# EAGLE board CT_schematic (EAGLE 7.6.0)

Size 100 x 80 mm. Coordinates in mm from the lower left corner, seen from the top.
Outline: 0,0 100,0 100,80 0,80 0,0
Copper layers (1*16): Top 0.035mm / dielectric 1.5mm / Bottom 0.035mm
Design rules "default": minimum track width 10mil, minimum drill 24mil, track to track 8mil, track to pad 8mil, pad to pad 8mil, via to via 8mil, smd to smd 8mil, copper to edge 40mil, drill to drill 8mil, minimum pad ring 10mil, minimum via ring 8mil, stop-mask expansion 4mil, vias tented up to drill 0mil, thermal gap 10mil

## Footprints (pad centres in the part's own frame; a part is rotated, then mirrored left to right if it is on the bottom)
C0603 = smd 0.8 x 0.8: 1 -0.762,0; 2 0.762,0
C0402 = smd 0.5 x 0.5: 1 -0.508,0; 2 0.508,0
C0805 = smd 1.2 x 1.3: 1 -1.016,0; 2 1.016,0
C1210 = smd 1.2 x 2.5: 1 -1.524,0; 2 1.524,0
C1206 = smd 1.3 x 1.6: 1 -1.524,0; 2 1.524,0
EXV-9H = smd 3.505 x 1.676: 1 -2.857,0; 2 2.857,0
L0603 = smd 0.8 x 0.8: 1 -0.762,0; 2 0.762,0
PJ-037B_PACKAGE = drill 3.7 square: 1 12,0 | drill 3.2 square: 2 6,0
R0603 = smd 0.8 x 0.8: 1 -0.762,0; 2 0.762,0
UFBGA169 = smd 0.35 x 0.35: A1 -3.9,3.9; A2 -3.25,3.9; A3 -2.6,3.9; A4 -1.95,3.9; A5 -1.3,3.9; A6 -0.65,3.9; A7 0,3.9; A8 0.65,3.9; A9 1.3,3.9; A10 1.95,3.9; A11 2.6,3.9; A12 3.25,3.9; A13 3.9,3.9; B1 -3.9,3.25; B2 -3.25,3.25; B3 -2.6,3.25; B4 -1.95,3.25; B5 -1.3,3.25; B6 -0.65,3.25; B7 0,3.25; B8 0.65,3.25; B9 1.3,3.25; B10 1.95,3.25; B11 2.6,3.25; B12 3.25,3.25; B13 3.9,3.25; C1 -3.9,2.6; C2 -3.25,2.6; C3 -2.6,2.6; C4 -1.95,2.6; C5 -1.3,2.6; C6 -0.65,2.6; C7 0,2.6; C8 0.65,2.6; C9 1.3,2.6; C10 1.95,2.6; C11 2.6,2.6; C12 3.25,2.6; C13 3.9,2.6; D1 -3.9,1.95; D2 -3.25,1.95; D3 -2.6,1.95; D4 -1.95,1.95; D5 -1.3,1.95; D6 -0.65,1.95; D7 0,1.95; D8 0.65,1.95; D9 1.3,1.95; D10 1.95,1.95; D11 2.6,1.95; D12 3.25,1.95; D13 3.9,1.95; E1 -3.9,1.3; E2 -3.25,1.3; E3 -2.6,1.3; E4 -1.95,1.3; E5 -1.3,1.3; E6 -0.65,1.3; E7 0,1.3; E8 0.65,1.3; E9 1.3,1.3; E10 1.95,1.3; E11 2.6,1.3; E12 3.25,1.3; E13 3.9,1.3; F1 -3.9,0.65; F2 -3.25,0.65; F3 -2.6,0.65; F4 -1.95,0.65; F5 -1.3,0.65; F6 -0.65,0.65; F7 0,0.65; F8 0.65,0.65; F9 1.3,0.65; F10 1.95,0.65; F11 2.6,0.65; F12 3.25,0.65; F13 3.9,0.65; G1 -3.9,0; G2 -3.25,0; G3 -2.6,0; G4 -1.95,0; G5 -1.3,0; G6 -0.65,0; G7 0,0; G8 0.65,0; G9 1.3,0; G10 1.95,0; G11 2.6,0; G12 3.25,0; G13 3.9,0; H1 -3.9,-0.65; H2 -3.25,-0.65; H3 -2.6,-0.65; H4 -1.95,-0.65; H5 -1.3,-0.65; H6 -0.65,-0.65; H7 0,-0.65; H8 0.65,-0.65; H9 1.3,-0.65; H10 1.95,-0.65; H11 2.6,-0.65; H12 3.25,-0.65; H13 3.9,-0.65; J1 -3.9,-1.3; J2 -3.25,-1.3; J3 -2.6,-1.3; J4 -1.95,-1.3; J5 -1.3,-1.3; J6 -0.65,-1.3; J7 0,-1.3; J8 0.65,-1.3; J9 1.3,-1.3; J10 1.95,-1.3; J11 2.6,-1.3; J12 3.25,-1.3; J13 3.9,-1.3; K1 -3.9,-1.95; K2 -3.25,-1.95; K3 -2.6,-1.95; K4 -1.95,-1.95; K5 -1.3,-1.95; K6 -0.65,-1.95; K7 0,-1.95; K8 0.65,-1.95; K9 1.3,-1.95; K10 1.95,-1.95; K11 2.6,-1.95; K12 3.25,-1.95; K13 3.9,-1.95; L1 -3.9,-2.6; L2 -3.25,-2.6; L3 -2.6,-2.6; L4 -1.95,-2.6; L5 -1.3,-2.6; L6 -0.65,-2.6; L7 0,-2.6; L8 0.65,-2.6; L9 1.3,-2.6; L10 1.95,-2.6; L11 2.6,-2.6; L12 3.25,-2.6; L13 3.9,-2.6; M1 -3.9,-3.25; M2 -3.25,-3.25; M3 -2.6,-3.25; M4 -1.95,-3.25; M5 -1.3,-3.25; M6 -0.65,-3.25; M7 0,-3.25; M8 0.65,-3.25; M9 1.3,-3.25; M10 1.95,-3.25; M11 2.6,-3.25; M12 3.25,-3.25; M13 3.9,-3.25; N1 -3.9,-3.9; N2 -3.25,-3.9; N3 -2.6,-3.9; N4 -1.95,-3.9; N5 -1.3,-3.9; N6 -0.65,-3.9; N7 0,-3.9; N8 0.65,-3.9; N9 1.3,-3.9; N10 1.95,-3.9; N11 2.6,-3.9; N12 3.25,-3.9; N13 3.9,-3.9
SSOP-28 = smd 1.5 x 0.4: 1 -3.625,4.225; 2 -3.625,3.575; 3 -3.625,2.925; 4 -3.625,2.275; 5 -3.625,1.625; 6 -3.625,0.975; 7 -3.625,0.325; 8 -3.625,-0.325; 9 -3.625,-0.975; 10 -3.625,-1.625; 11 -3.625,-2.275; 12 -3.625,-2.925; 13 -3.625,-3.575; 14 -3.625,-4.225; 15 3.625,-4.225; 16 3.625,-3.575; 17 3.625,-2.925; 18 3.625,-2.275; 19 3.625,-1.625; 20 3.625,-0.975; 21 3.625,-0.325; 22 3.625,0.325; 23 3.625,0.975; 24 3.625,1.625; 25 3.625,2.275; 26 3.625,2.925; 27 3.625,3.575; 28 3.625,4.225
FCI_10118193-0001LF = smd 0.4 x 1.35: 1 -1.3,2.675; 2 -0.65,2.675; 3 0,2.675; 4 0.65,2.675; 5 1.3,2.675 | smd 1.6 x 1.4: 6 -3.2,2.45; 7 3.2,2.45 | smd 1.9 x 1.9: 8 -1.2,0; 9 1.2,0 | hole 0.5: -3.3,0; 3.3,0
S29VS256RABBHW000 = smd 0.3 x 0.3: A1 -6,3; A14 0.5,3; C3 -5,2; C4 -4.5,2; C5 -4,2; C6 -3.5,2; C7 -3,2; C8 -2.5,2; C9 -2,2; C10 -1.5,2; C11 -1,2; C12 -0.5,2; D3 -5,1.5; D4 -4.5,1.5; D5 -4,1.5; D6 -3.5,1.5; D7 -3,1.5; D8 -2.5,1.5; D9 -2,1.5; D10 -1.5,1.5; D11 -1,1.5; D12 -0.5,1.5; E3 -5,1; E4 -4.5,1; E5 -4,1; E6 -3.5,1; E7 -3,1; E8 -2.5,1; E9 -2,1; E10 -1.5,1; E11 -1,1; E12 -0.5,1; F3 -5,0.5; F4 -4.5,0.5; F5 -4,0.5; F6 -3.5,0.5; F7 -3,0.5; F8 -2.5,0.5; F9 -2,0.5; F10 -1.5,0.5; F11 -1,0.5; F12 -0.5,0.5; H1 -6,-0.5; H14 0.5,-0.5
RHB32_3P45X3P45 = smd 0.85 x 0.28: 1 -2.475,1.75; 2 -2.475,1.25; 3 -2.475,0.75; 4 -2.475,0.25; 5 -2.475,-0.25; 6 -2.475,-0.75; 7 -2.475,-1.25; 8 -2.475,-1.75; 17 2.475,-1.75; 18 2.475,-1.25; 19 2.475,-0.75; 20 2.475,-0.25; 21 2.475,0.25; 22 2.475,0.75; 23 2.475,1.25; 24 2.475,1.75 | smd 0.28 x 0.85: 9 -1.75,-2.475; 10 -1.25,-2.475; 11 -0.75,-2.475; 12 -0.25,-2.475; 13 0.25,-2.475; 14 0.75,-2.475; 15 1.25,-2.475; 16 1.75,-2.475; 25 1.75,2.475; 26 1.25,2.475; 27 0.75,2.475; 28 0.25,2.475; 29 -0.25,2.475; 30 -0.75,2.475; 31 -1.25,2.475; 32 -1.75,2.475 | smd 3.45 x 3.45: 33 0,0
SOT143B = smd 1 x 0.7: 1 -0.75,-1 | smd 0.6 x 0.7: 2 0.95,-1; 3 0.95,1; 4 -0.95,1
QFN-28 = smd 0.813 x 0.305: 1 -2.451,1.5; 2 -2.451,1; 3 -2.451,0.5; 4 -2.451,0; 5 -2.451,-0.5; 6 -2.451,-1; 7 -2.451,-1.5; 15 2.451,-1.5; 16 2.451,-1; 17 2.451,-0.5; 18 2.451,0; 19 2.451,0.5; 20 2.451,1; 21 2.451,1.5 | smd 0.305 x 0.813: 8 -1.5,-2.451; 9 -1,-2.451; 10 -0.5,-2.451; 11 0,-2.451; 12 0.5,-2.451; 13 1,-2.451; 14 1.5,-2.451; 22 1.5,2.451; 23 1,2.451; 24 0.5,2.451; 25 0,2.451; 26 -0.5,2.451; 27 -1,2.451; 28 -1.5,2.451 | smd 3.607 x 3.607: 29 0,0
SJ-43515TS-SMT-TR = smd 2.2 x 3: 1 0.6,-7.4; 4 3.4,-7.4 | smd 3 x 3: 2 12.8,-7.4; 5 17,-3 | smd 2 x 3: 3 5.3,0; 6 2.5,0 | drill 1.8: P$7 4.5,-3.69; P$8 11.54,-3.69
ABS07-32.768KHZ-7-T = smd 1.1 x 2.4: 1 -2.5,0; 2 0,0
ABLS-12.000MHZ-B4-T = smd 5.6 x 2.8: 1 0,0; 2 9.5,0
ABLS-12.288MHZ-B4-T = smd 5.6 x 2.8: 1 -3.81,0; 2 5.69,0
ASFL1 = smd 1.7 x 1.5: 1 -1.27,-1.1; 2 1.27,-1.1; 3 1.27,1.1; 4 -1.27,1.1
WSON-8 = smd 0.3 x 0.6: 1 -0.75,0; 2 0.05,0; 3 0.85,0; 4 1.65,0; 5 1.65,3.8; 6 0.85,3.8; 7 0.05,3.8; 8 -0.75,3.8 | smd 3 x 2.6: PAD 0.45,1.9
SON-6 = smd 0.55 x 0.3: 1 -0.355,0.5 | smd 0.52 x 0.3: 2 -0.37,0; 3 -0.37,-0.5; 4 0.37,-0.5; 5 0.37,0; 6 0.37,0.5
SW_4-1437565-2 = smd 1.4 x 2.1: 1 -2.23,4.55; 2 -2.23,-4.55; 3 2.23,4.55; 4 2.23,-4.55
LGM67K-G1J2-24-Z = smd 0.8 x 1.4: A -2,0; C 0,0
NC7SZ125M5X = smd 1.3 x 0.7: 1 -1.3,0.95; 2 -1.3,0; 3 -1.3,-0.95; 4 1.3,-0.95; 5 1.3,0.95

## Placement (x,y rotation side)
C1  1e-06  [C0603]  -34.29,77.47 0 top  (outside the outline)
C2  1e-07  [C0603]  -38.1,77.47 0 top  (outside the outline)
C3  1e-07  [C0603]  -41.91,77.47 0 top  (outside the outline)
C4  1e-07  [C0603]  -45.72,77.47 0 top  (outside the outline)
C5  1e-07  [C0603]  -49.53,77.47 0 top  (outside the outline)
C6  1e-07  [C0603]  -53.34,77.47 0 top  (outside the outline)
C7  1e-07  [C0603]  -57.15,77.47 0 top  (outside the outline)
C8  1e-07  [C0603]  -60.96,77.47 0 top  (outside the outline)
C9  1e-07  [C0603]  -64.77,77.47 0 top  (outside the outline)
C10  1e-07  [C0603]  -68.58,77.47 0 top  (outside the outline)
C11  1e-07  [C0603]  -72.39,77.47 0 top  (outside the outline)
C12  1e-07  [C0603]  -76.2,77.47 0 top  (outside the outline)
C13  1e-07  [C0603]  -80.01,77.47 0 top  (outside the outline)
C14  1e-07  [C0603]  -83.82,77.47 0 top  (outside the outline)
C15  1e-07  [C0603]  -15.24,82.55 0 top  (outside the outline)
C16  1e-07  [C0603]  -19.05,82.55 0 top  (outside the outline)
C17  4.7e-06  [C0603]  -80.01,72.39 0 top  (outside the outline)
C18  2.2e-06  [C0603]  -83.82,72.39 0 top  (outside the outline)
C19  2.2e-06  [C0603]  -15.24,77.47 0 top  (outside the outline)
C20  1e-08  [C0603]  -22.86,82.55 0 top  (outside the outline)
C21  1e-06  [C0603]  -26.67,82.55 0 top  (outside the outline)
C22  1e-07  [C0603]  -30.48,82.55 0 top  (outside the outline)
C23  1e-11  [C0402]  -15.24,87.63 0 top  (outside the outline)
C24  1e-11  [C0402]  -19.05,87.63 0 top  (outside the outline)
C25  1e-07  [C0402]  -22.86,87.63 0 top  (outside the outline)
C26  4.7e-06  [C0805]  -15.24,67.31 0 top  (outside the outline)
C27  1e-07  [C0402]  -26.67,87.63 0 top  (outside the outline)
C28  1e-07  [C0402]  -30.48,87.63 0 top  (outside the outline)
C29  1e-07  [C0402]  -34.29,87.63 0 top  (outside the outline)
C30  2.2e-06  [C0603]  -19.05,77.47 0 top  (outside the outline)
C31  1e-07  [C0402]  -38.1,87.63 0 top  (outside the outline)
C32  2.2e-06  [C0603]  -22.86,77.47 0 top  (outside the outline)
C33  1e-07  [C0402]  -41.91,87.63 0 top  (outside the outline)
C34  2.2e-06  [C0603]  -26.67,77.47 0 top  (outside the outline)
C35  1e-07  [C0402]  -45.72,87.63 0 top  (outside the outline)
C36  1e-07  [C0402]  -49.53,87.63 0 top  (outside the outline)
C37  2.2e-06  [C0603]  -30.48,77.47 0 top  (outside the outline)
C38  1e-06  [C0603]  -34.29,82.55 0 top  (outside the outline)
C39  2.2e-05  [C1210]  -38.1,59.69 0 top  (outside the outline)
C40  2.2e-05  [C1210]  -44.45,59.69 0 top  (outside the outline)
C41  1e-09  [C0402]  -53.34,87.63 0 top  (outside the outline)
C42  1e-09  [C0402]  -57.15,87.63 0 top  (outside the outline)
C43  1e-07  [C0402]  -60.96,87.63 0 top  (outside the outline)
C44  1e-07  [C0402]  -64.77,87.63 0 top  (outside the outline)
C45  1e-07  [C0402]  -68.58,87.63 0 top  (outside the outline)
C46  1e-07  [C0402]  -72.39,87.63 0 top  (outside the outline)
C47  1e-07  [C0402]  -76.2,87.63 0 top  (outside the outline)
C48  1e-05  [C0805]  -20.32,67.31 0 top  (outside the outline)
C49  1e-05  [C0805]  -25.4,67.31 0 top  (outside the outline)
C50  1e-05  [C0805]  -30.48,67.31 0 top  (outside the outline)
C51  1e-05  [C0805]  -35.56,67.31 0 top  (outside the outline)
C52  1e-05  [C0805]  -40.64,67.31 0 top  (outside the outline)
C53  2.2e-11  [C0402]  -81.28,82.55 0 top  (outside the outline)
C54  2.2e-11  [C0402]  -85.09,82.55 0 top  (outside the outline)
C55  1e-08  [C0402]  -80.01,87.63 0 top  (outside the outline)
C56  1e-08  [C0402]  -83.82,87.63 0 top  (outside the outline)
C57  1e-08  [C0402]  -87.63,87.63 0 top  (outside the outline)
C58  1e-05  [C1206]  -57.15,59.69 0 top  (outside the outline)
C59  1e-05  [C0805]  -45.72,67.31 0 top  (outside the outline)
C60  1e-08  [C0402]  -15.24,92.71 0 top  (outside the outline)
C61  1e-05  [C1206]  -63.5,59.69 0 top  (outside the outline)
C62  1e-05  [C1210]  -50.8,59.69 0 top  (outside the outline)
C63  1e-07  [C0402]  -19.05,92.71 0 top  (outside the outline)
C64  0.0001  [EXV-9H]  -59.69,43.18 0 top  (outside the outline)
C65  0.0001  [EXV-9H]  -71.12,43.18 0 top  (outside the outline)
C66  1e-08  [C0402]  -22.86,92.71 0 top  (outside the outline)
C67  1e-08  [C0402]  -26.67,92.71 0 top  (outside the outline)
C68  1e-08  [C0402]  -30.48,92.71 0 top  (outside the outline)
F1  240.0  [L0603]  -38.1,82.55 0 top  (outside the outline)
J1  PJ-037B  [PJ-037B_PACKAGE]  -55.88,22.86 0 top  (outside the outline)
R2  1000.0  [R0603]  -41.91,82.55 0 top  (outside the outline)
R4  4700.0  [R0603]  -45.72,82.55 0 top  (outside the outline)
R5  4700.0  [R0603]  -49.53,82.55 0 top  (outside the outline)
R6  4700.0  [R0603]  -53.34,82.55 0 top  (outside the outline)
R7  10000.0  [R0603]  -71.12,67.31 0 top  (outside the outline)
R8  10000.0  [R0603]  -76.2,67.31 0 top  (outside the outline)
R9  10000.0  [R0603]  -81.28,67.31 0 top  (outside the outline)
R10  4700.0  [R0603]  -57.15,82.55 0 top  (outside the outline)
R11  10000.0  [R0603]  -86.36,67.31 0 top  (outside the outline)
R12  10000.0  [R0603]  -15.24,72.39 0 top  (outside the outline)
R13  10000.0  [R0603]  -20.32,72.39 0 top  (outside the outline)
R14  10000.0  [R0603]  -25.4,72.39 0 top  (outside the outline)
R15  10000.0  [R0603]  -30.48,72.39 0 top  (outside the outline)
R16  10000.0  [R0603]  -35.56,72.39 0 top  (outside the outline)
R17  10000.0  [R0603]  -40.64,72.39 0 top  (outside the outline)
R18  10000.0  [R0603]  -45.72,72.39 0 top  (outside the outline)
R19  47000.0  [R0603]  -50.8,72.39 0 top  (outside the outline)
R20  47000.0  [R0603]  -55.88,72.39 0 top  (outside the outline)
R21  47000.0  [R0603]  -60.96,72.39 0 top  (outside the outline)
R22  680.0  [R0603]  -60.96,82.55 0 top  (outside the outline)
R23  100000.0  [R0603]  -50.8,67.31 0 top  (outside the outline)
R24  806.0  [R0603]  -64.77,82.55 0 top  (outside the outline)
R25  1000.0  [R0603]  -68.58,82.55 0 top  (outside the outline)
R26  100000.0  [R0603]  -55.88,67.31 0 top  (outside the outline)
R27  2231.0  [R0603]  -72.39,82.55 0 top  (outside the outline)
R28  1000.0  [R0603]  -76.2,82.55 0 top  (outside the outline)
R29  10000.0  [R0603]  -66.04,72.39 0 top  (outside the outline)
R30  10000.0  [R0603]  -71.12,72.39 0 top  (outside the outline)
R31  82000.0  [R0603]  -76.2,72.39 0 top  (outside the outline)
R32  300000.0  [R0603]  -60.96,67.31 0 top  (outside the outline)
R33  120000.0  [R0603]  -66.04,67.31 0 top  (outside the outline)
U1  STM32F469AIH6  [UFBGA169]  -35.56,7.62 0 top  (outside the outline)
U2  FT232RL-REEL  [SSOP-28]  -20.32,7.62 0 top  (outside the outline)
U3  10118193-0001LF  [FCI_10118193-0001LF]  -19.05,43.18 0 top  (outside the outline)
U4  S29VS256RABBHW000  [S29VS256RABBHW000]  -46.99,43.18 0 top  (outside the outline)
U5  TUSB1210BRHBR  [RHB32_3P45X3P45]  -57.15,52.07 0 top  (outside the outline)
U6  10118193-0001LF  [FCI_10118193-0001LF]  -29.21,43.18 0 top  (outside the outline)
U7  prtr5v0u2ax  [SOT143B]  -43.18,92.71 0 top  (outside the outline)
U8  WM8731CLSEFL  [QFN-28]  -30.48,60.96 0 top  (outside the outline)
U9  SJ-43515TS-SMT-TR  [SJ-43515TS-SMT-TR]  -67.31,10.16 0 top  (outside the outline)
U10  SJ-43515TS-SMT-TR  [SJ-43515TS-SMT-TR]  -39.37,24.13 0 top  (outside the outline)
U11  ABS07-32.768KHZ-7-T  [ABS07-32.768KHZ-7-T]  -77.47,52.07 0 top  (outside the outline)
U12  ABLS-12.000MHZ-B4-T  [ABLS-12.000MHZ-B4-T]  -29.21,53.34 0 top  (outside the outline)
U13  ABLS-12.288MHZ-B4-T  [ABLS-12.288MHZ-B4-T]  -45.72,53.34 0 top  (outside the outline)
U14  ASFL1-19.2MHZ-NCS  [ASFL1]  -68.58,34.29 0 top  (outside the outline)
U15  ASFL1-25MHZ-NCS  [ASFL1]  -85.09,34.29 0 top  (outside the outline)
U16  LP3878SDX-ADJ/NOPB  [WSON-8]  -30.48,33.02 0 top  (outside the outline)
U17  LP3878SDX-ADJ/NOPB  [WSON-8]  -50.8,33.02 0 top  (outside the outline)
U18  TPS3895ADRYR  [SON-6]  -46.99,91.44 0 top  (outside the outline)
U19  4-1437565-2  [SW_4-1437565-2]  -72.39,21.59 0 top  (outside the outline)
U20  Q65110A2395  [LGM67K-G1J2-24-Z]  -17.78,60.96 0 top  (outside the outline)
U21  nc7sz125m5x  [NC7SZ125M5X]  -68.58,59.69 0 top  (outside the outline)
U22  nc7sz125m5x  [NC7SZ125M5X]  -74.93,59.69 0 top  (outside the outline)
U23  nc7sz125m5x  [NC7SZ125M5X]  -81.28,59.69 0 top  (outside the outline)

## Library data of the parts
C1-C68 F1 J1 R2 R4-R33 U1-U23 = circuit_tree

## Nets
CLK_CRYSTAL_U1_E1: C23.1 U1.E1 U11.1
CLK_CRYSTAL_U1_F1: C24.1 U1.F1 U11.2
CLK_CRYSTAL_U2_27: U2.27 U12.1
CLK_CRYSTAL_U2_28: U2.28 U12.2
CLK_CRYSTAL_U8_1: C53.1 U8.1 U13.1
CLK_CRYSTAL_U8_2: C54.1 U8.2 U13.2
CLK_U1_G2: U1.G2 U15.3
CLK_U5_1: U5.1 U14.3
GND: C1.2 C2.2 C3.2 C4.2 C5.2 C6.2 C7.2 C8.2 C9.2 C10.2 C11.2 C12.2 C13.2 C14.2 C15.2 C16.2 C17.2 C18.2 C19.2 C20.2 C21.2 C22.2 C23.2 C24.2 C25.2 C26.2 C27.2 C28.2 C29.2 C30.2 C31.2 C32.2 C33.2 C34.2 C35.2 C36.2 C37.2 C38.2 C42.2 C43.2 C44.2 C45.2 C46.2 C47.2 C48.2 C49.2 C50.2 C51.2 C52.2 C53.2 C54.2 C55.2 C56.2 C57.2 C58.2 C59.2 C60.2 C61.2 C62.2 C63.2 C64.2 C65.2 C66.2 C67.2 C68.2 J1.2 R2.2 R12.2 R18.2 R19.2 R20.2 R21.2 R25.2 R28.2 R31.2 R33.2 U1.D11 U1.E3 U1.F5 U1.F8 U1.G7 U1.G9 U1.H11 U1.J1 U1.J2 U1.J6 U1.J7 U1.J10 U1.K11 U1.M9 U2.7 U2.18 U2.21 U2.25 U2.26 U3.5 U3.6 U3.7 U3.8 U3.9 U4.C5 U4.D12 U4.E3 U4.F5 U5.33 U6.5 U6.6 U6.7 U6.8 U6.9 U7.1 U8.4 U8.15 U8.19 U8.25 U8.26 U8.29 U9.1 U10.1 U14.2 U15.2 U16.3 U16.PAD U17.3 U17.PAD U18.2 U20.C U21.1 U21.3 U22.1 U22.3 U23.1 U23.3
NET_U1_A5: R8.1 U1.A5
NET_U1_C3: R7.1 U1.C3
NET_U1_D12: C19.1 U1.D12
NET_U1_H2: R5.1 U1.H2 U22.4
NET_U1_J3: C20.1 C21.1 F1.1 U1.J3
NET_U1_J11: U1.J11
NET_U1_K12: U1.K12
NET_U1_L5: R9.1 U1.L5
NET_U1_N9: C18.1 U1.N9
NET_U1_N12: U20.A
NET_U1_N13: U19.3 U19.4
NET_U2_14: R11.1 U2.14
NET_U2_17: C27.1 U2.17
NET_U2_19: R12.1 U2.19
NET_U3_1: R10.1 U3.1
NET_U3_2: U2.16 U3.2
NET_U3_3: U2.15 U3.3
NET_U3_19: R10.2
NET_U4_C9: U4.C9
NET_U4_D8: R4.1 U4.D8 U21.4
NET_U5_11: R17.1 U5.11
NET_U5_12: C37.1 U5.12
NET_U5_14: R18.1 U5.14
NET_U5_20: C34.1 U5.20
NET_U5_27: R6.1 U5.27 U23.4
NET_U6_1: C38.1 U5.22 U6.1 U7.4
NET_U6_2: U5.19 U6.2 U7.3
NET_U6_3: U5.18 U6.3 U7.2
NET_U8_9: U8.9
NET_U8_20: C47.1 C52.1 U8.20
NET_U9_2: C40.1 R20.1 U9.2
NET_U9_5: C39.1 R19.1 U9.5
NET_U9_13: C39.2
NET_U9_14: C40.2
NET_U10_5: C41.1 C42.1 R21.1 R22.1 U10.5
NET_U10_21: R22.2
NET_U10_22: C41.2
NET_U16_1: C57.1 U16.1
NET_U16_6: R24.2 R25.1 U16.6
NET_U16_8: R23.1 U16.8
NET_U17_1: C60.1 U17.1
NET_U17_6: R27.2 R28.1 U17.6
NET_U17_8: R26.1 U17.8
NET_U18_1: R30.1 R31.1 U18.1
NET_U18_3: R32.2 R33.1 U18.3
NET_U18_4: R29.1 U18.4 U21.2 U22.2 U23.2
NET_U19_1: R2.1 U19.1 U19.2
PROC_FMC_A16: U1.M11 U4.D4
PROC_FMC_A17: U1.M13 U4.C11
PROC_FMC_A18: U1.M12 U4.D10
PROC_FMC_A19: U1.C1 U4.C10
PROC_FMC_A20: U1.C2 U4.D5
PROC_FMC_A21: U1.D1 U4.C4
PROC_FMC_A22: U1.D2 U4.C12
PROC_FMC_A23: U1.B2 U4.D7
PROC_FMC_CLK: U1.C8 U4.C6
PROC_FMC_D0: U1.L12 U4.F3
PROC_FMC_D1: U1.L13 U4.F4
PROC_FMC_D2: U1.C9 U4.E6
PROC_FMC_D3: U1.C7 U4.E7
PROC_FMC_D4: U1.N7 U4.F8
PROC_FMC_D5: U1.G6 U4.F9
PROC_FMC_D6: U1.H6 U4.E10
PROC_FMC_D7: U1.H7 U4.E11
PROC_FMC_D8: U1.K7 U4.E4
PROC_FMC_D9: U1.L7 U4.E5
PROC_FMC_D10: U1.J8 U4.F6
PROC_FMC_D11: U1.K8 U4.F7
PROC_FMC_D12: U1.L8 U4.E8
PROC_FMC_D13: U1.L10 U4.E9
PROC_FMC_D14: U1.M10 U4.F11
PROC_FMC_D15: U1.L11 U4.F12
PROC_FMC_NE2: R14.1 U1.E6 U4.D11
PROC_FMC_NL: U1.B4 U4.D6
PROC_FMC_NOE: R16.1 U1.C6 U4.E12
PROC_FMC_NWAIT: R13.1 U1.D7 U4.C3
PROC_FMC_NWE: R15.1 U1.B7 U4.C8
PROC_I2S2_CK: U1.C11 U8.7
PROC_I2S2_EXT_SD: U1.B12 U8.10
PROC_I2S2_SD: U1.B10 U8.8
PROC_I2S2_WS: U1.B13 U8.9 U8.11
PROC_UART4_RX: U1.B9 U2.1
PROC_UART4_TX: U1.C10 U2.5
PROC_USB_OTG_HS_ULPI_CK: U1.M3 U5.26
PROC_USB_OTG_HS_ULPI_D0: U1.K3 U5.3
PROC_USB_OTG_HS_ULPI_D1: U1.N4 U5.4
PROC_USB_OTG_HS_ULPI_D2: U1.K5 U5.5
PROC_USB_OTG_HS_ULPI_D3: U1.M8 U5.6
PROC_USB_OTG_HS_ULPI_D4: U1.N8 U5.7
PROC_USB_OTG_HS_ULPI_D5: U1.N10 U5.9
PROC_USB_OTG_HS_ULPI_D6: U1.N11 U5.10
PROC_USB_OTG_HS_ULPI_D7: U1.D5 U5.13
PROC_USB_OTG_HS_ULPI_DIR: U1.F2 U5.31
PROC_USB_OTG_HS_ULPI_NXT: U1.M2 U5.2
PROC_USB_OTG_HS_ULPI_STP: U1.M1 U5.29
VCC_S1_9V4: C58.1 C61.1 C64.1 C65.1 J1.1 R23.2 R26.2 U16.4 U17.4
VCC_TIER1_1V8: C1.1 C2.1 C3.1 C4.1 C5.1 C6.1 C7.1 C8.1 C9.1 C10.1 C11.1 C12.1 C13.1 C14.1 C15.1 C16.1 C17.1 C28.1 C29.1 C30.1 C31.1 C32.1 C35.1 C36.1 C43.1 C44.1 C45.1 C46.1 C48.1 C49.1 C50.1 C51.1 C59.1 C63.1 C66.1 C67.1 C68.1 F1.2 R4.2 R5.2 R6.2 R7.2 R8.2 R9.2 R13.2 R14.2 R15.2 R16.2 R17.2 R24.1 R29.2 R30.2 R32.1 U1.D3 U1.D10 U1.E5 U1.F4 U1.F7 U1.G8 U1.J4 U1.K6 U1.K10 U1.K13 U1.L6 U1.L9 U2.4 U4.C7 U4.D3 U4.F10 U5.28 U5.30 U5.32 U8.3 U8.5 U8.12 U8.18 U16.5 U18.6 U21.5 U22.5 U23.5
VCC_TIER1_3V3: C22.1 C25.1 C26.1 C33.1 C55.1 C56.1 C62.1 R11.2 R27.1 U1.G11 U2.20 U5.21 U14.4 U15.4 U17.5

## Tracks (layer width: path | path; a pad name or v marks a point on that pad's centre or on a via)
CLK_CRYSTAL_U1_E1  (2 unrouted)
CLK_CRYSTAL_U1_F1  (2 unrouted)
CLK_CRYSTAL_U2_27  (1 unrouted)
CLK_CRYSTAL_U2_28  (1 unrouted)
CLK_CRYSTAL_U8_1  (2 unrouted)
CLK_CRYSTAL_U8_2  (2 unrouted)
CLK_U1_G2  (1 unrouted)
CLK_U5_1  (1 unrouted)
GND  (132 unrouted)
NET_U1_A5  (1 unrouted)
NET_U1_C3  (1 unrouted)
NET_U1_D12  (1 unrouted)
NET_U1_H2  (2 unrouted)
NET_U1_J3  (3 unrouted)
NET_U1_L5  (1 unrouted)
NET_U1_N9  (1 unrouted)
NET_U1_N13  (1 unrouted)
NET_U2_14  (1 unrouted)
NET_U2_17  (1 unrouted)
NET_U2_19  (1 unrouted)
NET_U3_1  (1 unrouted)
NET_U3_2  (1 unrouted)
NET_U3_3  (1 unrouted)
NET_U4_D8  (2 unrouted)
NET_U5_11  (1 unrouted)
NET_U5_12  (1 unrouted)
NET_U5_14  (1 unrouted)
NET_U5_20  (1 unrouted)
NET_U5_27  (2 unrouted)
NET_U6_1  (3 unrouted)
NET_U6_2  (2 unrouted)
NET_U6_3  (2 unrouted)
NET_U8_20  (2 unrouted)
NET_U9_2  (2 unrouted)
NET_U9_5  (2 unrouted)
NET_U10_5  (4 unrouted)
NET_U16_1  (1 unrouted)
NET_U16_6  (2 unrouted)
NET_U16_8  (1 unrouted)
NET_U17_1  (1 unrouted)
NET_U17_6  (2 unrouted)
NET_U17_8  (1 unrouted)
NET_U18_1  (2 unrouted)
NET_U18_3  (2 unrouted)
NET_U18_4  (4 unrouted)
NET_U19_1  (2 unrouted)
PROC_FMC_A16  (1 unrouted)
PROC_FMC_A17  (1 unrouted)
PROC_FMC_A18  (1 unrouted)
PROC_FMC_A19  (1 unrouted)
PROC_FMC_A20  (1 unrouted)
PROC_FMC_A21  (1 unrouted)
PROC_FMC_A22  (1 unrouted)
PROC_FMC_A23  (1 unrouted)
PROC_FMC_CLK  (1 unrouted)
PROC_FMC_D0  (1 unrouted)
PROC_FMC_D1  (1 unrouted)
PROC_FMC_D2  (1 unrouted)
PROC_FMC_D3  (1 unrouted)
PROC_FMC_D4  (1 unrouted)
PROC_FMC_D5  (1 unrouted)
PROC_FMC_D6  (1 unrouted)
PROC_FMC_D7  (1 unrouted)
PROC_FMC_D8  (1 unrouted)
PROC_FMC_D9  (1 unrouted)
PROC_FMC_D10  (1 unrouted)
PROC_FMC_D11  (1 unrouted)
PROC_FMC_D12  (1 unrouted)
PROC_FMC_D13  (1 unrouted)
PROC_FMC_D14  (1 unrouted)
PROC_FMC_D15  (1 unrouted)
PROC_FMC_NE2  (2 unrouted)
PROC_FMC_NL  (1 unrouted)
PROC_FMC_NOE  (2 unrouted)
PROC_FMC_NWAIT  (2 unrouted)
PROC_FMC_NWE  (2 unrouted)
PROC_I2S2_CK  (1 unrouted)
PROC_I2S2_EXT_SD  (1 unrouted)
PROC_I2S2_SD  (1 unrouted)
PROC_I2S2_WS  (2 unrouted)
PROC_UART4_RX  (1 unrouted)
PROC_UART4_TX  (1 unrouted)
PROC_USB_OTG_HS_ULPI_CK  (1 unrouted)
PROC_USB_OTG_HS_ULPI_D0  (1 unrouted)
PROC_USB_OTG_HS_ULPI_D1  (1 unrouted)
PROC_USB_OTG_HS_ULPI_D2  (1 unrouted)
PROC_USB_OTG_HS_ULPI_D3  (1 unrouted)
PROC_USB_OTG_HS_ULPI_D4  (1 unrouted)
PROC_USB_OTG_HS_ULPI_D5  (1 unrouted)
PROC_USB_OTG_HS_ULPI_D6  (1 unrouted)
PROC_USB_OTG_HS_ULPI_D7  (1 unrouted)
PROC_USB_OTG_HS_ULPI_DIR  (1 unrouted)
PROC_USB_OTG_HS_ULPI_NXT  (1 unrouted)
PROC_USB_OTG_HS_ULPI_STP  (1 unrouted)
VCC_S1_9V4  (8 unrouted)
VCC_TIER1_1V8  (80 unrouted)
VCC_TIER1_3V3  (14 unrouted)